# Altium PCB SD10-99-1402.PcbDoc
Units mm, origin at the board's own origin, x right, y up, seen from the top; angles counter-clockwise.
Board outline 95.68 x 44.09 mm, 2 copper layers (TopLayer, BottomLayer); 48 components, 53 nets, 157 pads, 44 vias.
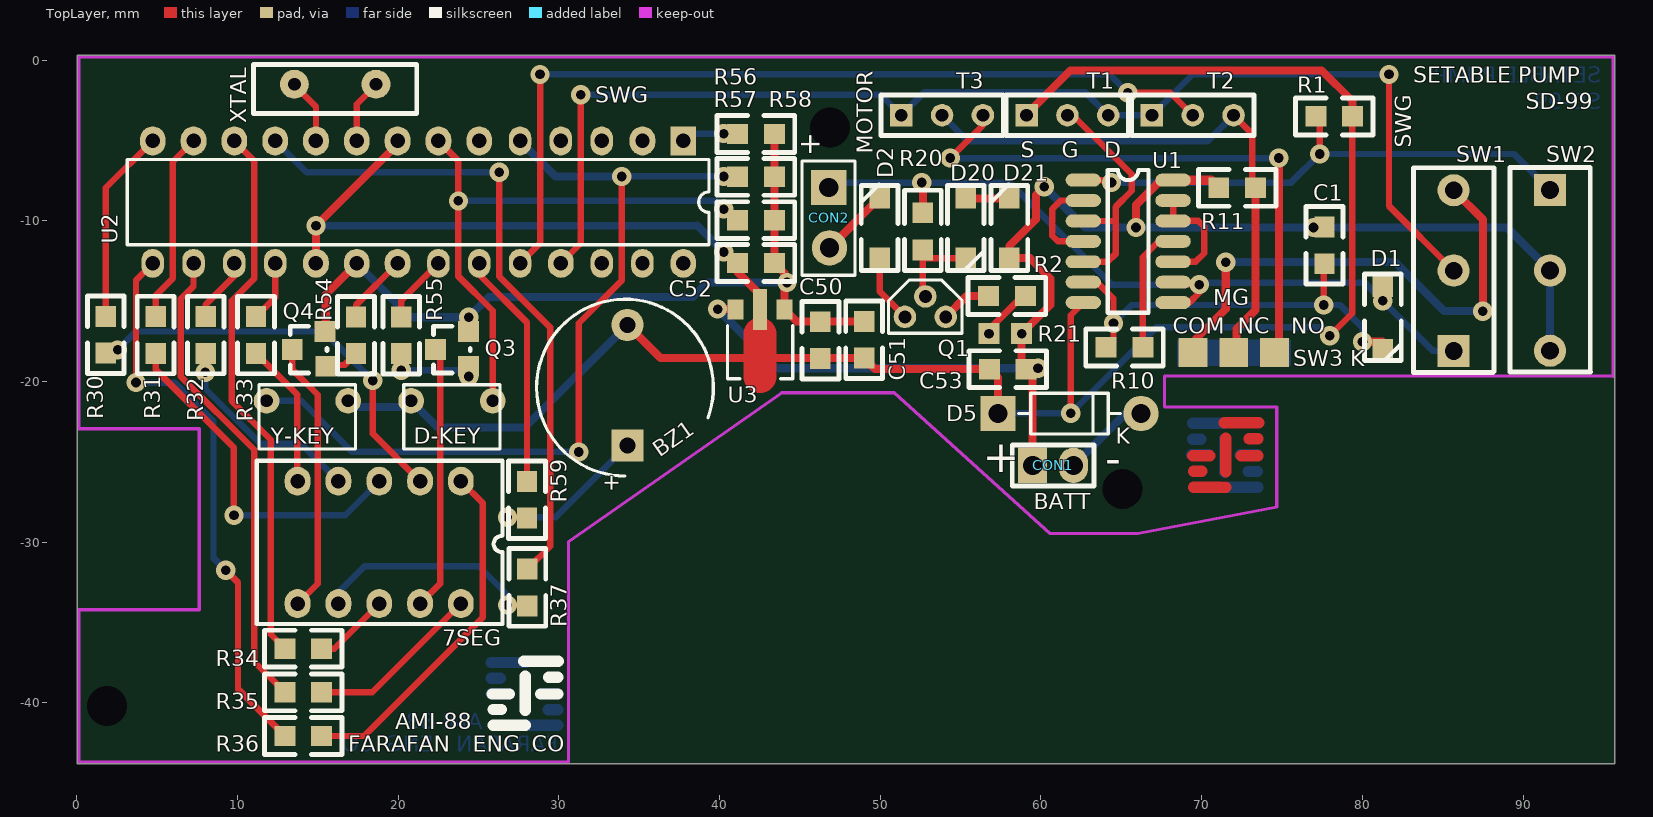
[diagram p0: TopLayer view]
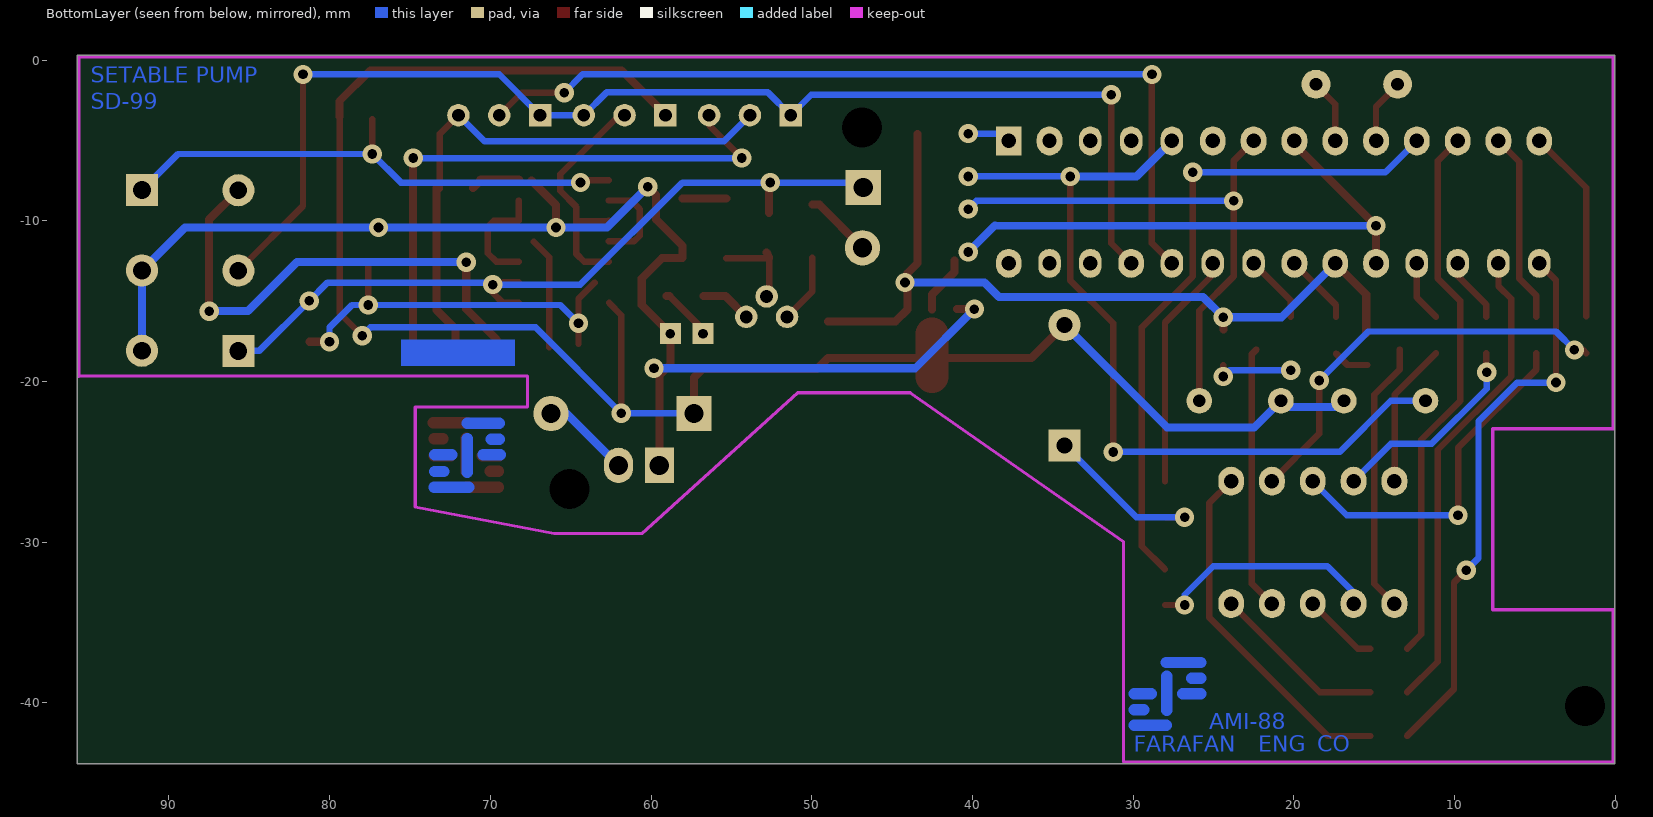
[diagram p1: BottomLayer view, seen from below]

## Layer stack, top to bottom
TopSolder: solder mask 0.0102, Solder Resist, Dk 3.5
TopLayer: signal copper 0.0356
Dielectric1: dielectric 0.32, FR-4, Dk 4.8
BottomLayer: signal copper 0.0356
BottomSolder: solder mask 0.0102, Solder Resist, Dk 3.5

## Board outline
0.027,-43.788 95.711,-43.788 95.711,0.304 0.027,0.304

## Design rules (kind name [scope] priority, off if disabled: settings)
AcuteAngle [All] p1 off: minimum=4.50000000000000E+0001 checktracksonly=FALSE
Clearance [All] p1: gap=0.254
ComponentClearance [All] p1 off: gap=0 collisioncheckmode=3 verticalgap=0.254 showdistances=FALSE
FabricationTestPointUsage TestPointUsage [All] p1: valid=0 allowmultiple=FALSE
FabricationTestpoint Testpoint [All] p1: side=3 testpointundercomponent=TRUE minsize=1.016 maxsize=2.54 preferedsize=1.524 minholesize=0.508 maxholesize=1.016 preferedholesize=0.813 testpointgrid=0.025 allowsidetop=TRUE allowsidebottom=TRUE usegrid=TRUE gridtolerance=0
FanoutControl Fanout_Small [All] p1 off: bgadir=Out bgaviamode=Centered fanoutstyle=Auto fanoutdirection=Alternating viagrid=0.025 // Protel DXP Scope 1 Expression Was: (CompPinCount < 5)   Fanout_Small (Default Rule)
FanoutControl Fanout_Default [All] p2: bgadir=Out bgaviamode=Centered fanoutstyle=Auto fanoutdirection=Alternating viagrid=0.025 // Fanout_Default (Default Rule)
FanoutControl Fanout_SOIC [All] p3 off: bgadir=Out bgaviamode=Centered fanoutstyle=Auto fanoutdirection=Alternating viagrid=0.025 // Protel DXP Scope 1 Expression Was: IsSOIC   Fanout_SOIC (Default Rule)
FanoutControl Fanout_BGA [All] p4 off: bgadir=Out bgaviamode=Centered fanoutstyle=Auto fanoutdirection=Alternating viagrid=0.025 // Protel DXP Scope 1 Expression Was: IsBGA   Fanout_BGA (Default Rule)
FanoutControl Fanout_LCC [All] p5 off: bgadir=Out bgaviamode=Centered fanoutstyle=Auto fanoutdirection=Alternating viagrid=0.025 // Protel DXP Scope 1 Expression Was: IsLCC   Fanout_LCC (Default Rule)
Length [All] p1: maxlimit=2540 minlimit=0
ParallelSegment [All] p1: limit=254 gap=0.254
PolygonConnect [All] p1: connectstyle=Relief reliefconductorwidth=0.254 reliefentries=4 polygonreliefangle="90 Angle" airgapwidth=0.254
RoutingCorners [All] p1: cornerstyle=45-Degree minsetback=0.127 maxsetback=2.54
RoutingLayers [All] p1: top layer_v5=FALSE bottom layer_v5=FALSE
RoutingVias [All] p1: holewidth=0.711 width=1.27 viastyle="Through Hole" minholewidth=0.711 minwidth=1.27 maxholewidth=0.711 maxwidth=1.27
SMDNeckDown [All] p1 off: percent=50.000
SMDToCorner [All] p1 off: distance=0
SMDToPlane [All] p1 off: distance=0
SilkToSolderMaskClearance SilkscreenOverComponentPads [All] p1 off: minsilkscreentomaskgap=0.254 clearancetoexposedcopper=TRUE // Protel DXP Scope 1 Expression Was: IsPad
SolderMaskExpansion [All] p1: expansion=0.102
UnpouredPolygon [All] p1: allowunpoured=FALSE
ViasUnderSMD [All] p1: allowed=TRUE
Width [All] p1: maxlimit=0.254 minlimit=0.254 preferedwidth=0.254
Width Width_1 [All] p2: maxlimit=0.5 minlimit=0.5 preferedwidth=0.5
18 further rules are at their usual default settings.

## Components (designator, comment, footprint, x,y, rotation, side; value= is the part's Value field where it differs from the comment)
7SEG "CA" 7SEG2_CA 18.821,-30.012 r180 top locked
BZ1 "12MM-ARISON" BUZZER 33.884,-20.549 r270 top
C1 "1uF" 0805#1 77.648,-10.389 r270 top
C50 "100nF" 0805#1 46.279,-18.567 r90 top
C51 "10uF" 0805#1 48.997,-16.256 r270 top
C52 "100nF" 0805#1 41.123,-12.624 r0 top
C53 "1uF" 0805#1 59.08,-19.228 r180 top
CON1 "BATT" RAD0.1 59.487,-25.222 r0 top
CON2 "MOTOR" "MOTOR PLUG" 46.787,-7.925 r270 top
D1 "1N4148" 0805#2 81.28,-14.58 r270 top
D2 "1N4148" 0805#3 49.962,-11.811 r90 top
D5 "1N5819" Diode0.4 57.328,-21.996 r0 top
D20 "Z4.7" 0805#4 55.321,-9.525 r270 top
D21 "Z4.7" 0805#3 58.039,-11.811 r90 top
Q1 "BC214B" TO-92A 54.077,-15.977 r180 top
Q3 "2N3906" SOT-23#1 24.359,-18.974 r90 top
Q4 "2N3906" SOT-23#2 15.443,-18.974 r90 top
R1 "4.7M" 0805#1 77.114,-3.505 r0 top
R2 "4.7" 0805#1 56.744,-14.681 r0 top
R10 "3.9M" 0805#1 66.345,-17.882 r180 top
R11 "2M" 0805#1 73.355,-7.95 r180 top
R20 "4.7K" 0805#5 52.654,-11.811 r90 top
R30 "560" 0805#1 1.803,-18.237 r90 top
R31 "560" 0805#1 4.902,-18.25 r90 top
R32 "560" 0805#1 8.026,-18.25 r90 top
R33 "560" 0805#1 11.151,-18.25 r90 top
R34 "560" 0805#1 15.24,-36.627 r180 top
R35 "560" 0805#1 15.24,-39.345 r180 top
R36 "560" 0805#1 15.24,-42.062 r180 top
R37 "560" 0805#1 28.042,-33.96 r90 top
R54 "1.2K" 0805#1 17.374,-18.263 r90 top
R55 "1.2K" 0805#1 20.193,-18.263 r90 top
R56 "1K" 0805#1 41.123,-4.597 r0 top
R57 "10K" 0805#1 41.123,-7.264 r0 top
R58 "10K" 0805#1 41.123,-9.957 r0 top
R59 "33" 0805#1 28.016,-28.499 r90 top
SW1 "MICRO SW" MICSW 85.598,-12.852 r0 top
SW2 "MICRO SW" MICSW 91.77,-13.335 r180 top
SW3 "MICRO SW" MICSW_STND 72,-18.364 r0 top
T1 "VN10" TO-126 64.188,-3.429 r0 top
T2 "VN10" TO-126 71.988,-3.429 r0 top
T3 "VN10" TO-126 56.388,-3.429 r0 top
U1 "4093" SO-14 62.636,-7.468 r0 top
U2 "PIC16F876A" DIP-28 37.744,-5.029 r180 top
U3 "78L05" SOT-89 44.044,-15.519 r180 top
XTAL "11.0592MHz" XTAL1 18.618,-1.803 r180 top
? "Y-KEY" "Reset Key" 11.807,-21.202 r0 top
? "D-KEY" "Reset Key" 20.805,-21.202 r0 top

## Footprints (in the part's own frame and the unit in brackets; to place one, negate y for a bottom-side part, rotate by r counter-clockwise, add the part's x,y. Pads: shape width x height; smd on the part's side, far side on the other; paste and mask are expansions set on the pad)
7SEG2_CA [mm]
  oval 1.6x1.8 hole 0.9: 1(-5.08,-3.81) 2(-2.54,-3.81) 3(0,-3.81) 4(2.54,-3.81) 5(5.08,-3.81) 6(5.08,3.81) 7(2.54,3.81) 8(0,3.81) 9(-2.54,3.81) 10(-5.08,3.81)
  silkscreen extent -7.62,-5.08 7.62,5.08
0805#1 [mm]
  rect 1.3x1.27 smd: 1(0,0) 2(2.286,0)
  silkscreen extent -1.27,-1.14 3.56,1.14
0805#2 [mm]
  rect 1.3x1.27 smd: 1(-0.48,0) 2(3.42,0)
  silkscreen extent -1.27,-1.14 4.12,1.14
0805#3 [mm]
  rect 1.3x1.27 smd: 1(-0.489,0) 2(3.211,0)
  silkscreen extent -1.27,-1.14 4.01,1.14
0805#4 [mm]
  rect 1.3x1.27 smd: 1(-0.925,0) 2(2.775,0)
  silkscreen extent -1.73,-1.14 3.56,1.14
0805#5 [mm]
  rect 1.3x1.27 smd: 1(0,0) 2(2.311,0)
  silkscreen extent -1.27,-1.14 3.71,1.14
BUZZER [mm]
  round 2 hole 1: 1(-4.071,0.381)
  rect 2x2 hole 1: 2(3.429,0.381)
  silkscreen extent -5.67,-5.27 5.33,5.73
Diode0.4 [mm]
  rect 2.2x2.2 hole 1.2: A(0,0)
  round 2.2 hole 1.2: K(8.9,0)
  silkscreen extent 1.27,-1.27 7.62,1.27
DIP-28 [mm]
  rect 1.6x1.8 hole 0.9: 1(0,0)
  oval 1.6x1.8 hole 0.9: 2(2.54,0) 6(12.7,0) 7(15.24,0) 8(17.78,0) 9(20.32,0) 10(22.86,0) 11(25.4,0) 12(27.94,0) 13(30.48,0) 14(33.02,0) 19(22.86,7.62) 20(20.32,7.62) 21(17.78,7.62) 25(7.62,7.62) 28(0,7.62)
  oval 1.4x1.8 hole 0.9: 3(5.08,0) 4(7.62,0) 5(10.16,0) 15(33.02,7.62) 16(30.48,7.62) 17(27.94,7.62) 18(25.4,7.62) 22(15.24,7.62) 23(12.7,7.62) 24(10.16,7.62) 26(5.08,7.62) 27(2.54,7.62)
  silkscreen extent -1.59,1.16 34.61,6.46
MICSW [mm]
  round 2 hole 1.1: 1(0.086,4.753) 2(0.086,-0.247)
  rect 2x2 hole 1.1: 3(0.086,-5.247)
  silkscreen extent -2.41,-5.55 2.59,6.15
MICSW_STND [mm]
  rect 1.8x1.8 smd: 1(2.54,0.164) 2(0,0.164) 3(-2.54,0.164)
  BottomLayer region: -3.547,-0.686 3.565,-0.686 3.565,0.965 -3.547,0.965
"MOTOR PLUG" [mm]
  rect 2.2x2.2 hole 1.2: 1(0,0)
  round 2.2 hole 1.2: 2(3.759,0.056)
  silkscreen extent -1.65,-1.65 5.46,1.65
RAD0.1 [mm]
  rect 1.8x2.2 hole 1.2: 1(0,0)
  oval 1.8x2.2 hole 1.2: 2(2.54,0)
  silkscreen extent -1.27,-1.27 3.81,1.27
"Reset Key" [mm]
  round 1.6 hole 0.8: 0(0,0) 1(5.08,0)
  silkscreen extent -0.46,-3 5.54,1
SO-14 [mm]
  oval 2.2x0.8 smd: 1(0,0) 2(0,-1.27) 3(0,-2.54) 4(0,-3.81) 5(0,-5.08) 6(0,-6.35) 7(0,-7.62) 8(5.588,-7.62) 9(5.588,-6.35) 10(5.588,-5.08) 11(5.588,-3.81) 12(5.588,-2.54) 13(5.588,-1.27) 14(5.588,0)
  silkscreen extent 1.52,-8.25 4.06,0.64
SOT-23#1 [mm]
  rect 1.3x1.3 smd: +5(2.083,-0.025) A3(0.965,2.032) B3(-0.076,-0.025)
  silkscreen extent -0.51,-0.13 2.41,2.16
SOT-23#2 [mm]
  rect 1.3x1.3 smd: +5(2.083,0) A4(0.965,2.032) B4(-0.076,-0.051)
  silkscreen extent -0.51,-0.13 2.41,2.16
SOT-89 [mil]
  rect 39.37x50 smd: 1(0,0) 3(120,0)
  rect 34x100 smd: 2(60,0)
  TopLayer lines w80: 60,164.59 60,60
  silkscreen extent -20,40 140,170
TO-92A [mm]
  round 1.4 hole 0.8: 1(2.54,0) 2(1.27,-1.27) 3(0,0)
  silkscreen extent -1.02,-2.29 3.56,1.02
TO-126 [mm]
  rect 1.4x1.4 hole 0.8: 1(-5.08,0)
  round 1.4 hole 0.8: 2(-2.54,0) 3(0,0)
  silkscreen extent -6.35,-1.27 1.27,1.27
XTAL1 [mm]
  round 1.8 hole 0.8: 1(0,-0.303) 2(5.08,-0.303)
  silkscreen extent -2.54,-1.52 7.62,1.52

## Free pads (board coordinates)
  rect 1.3x1.3 hole 0.6: 0(56.769,-17.018) 1(58.801,-17.018)
  round 0 hole 2.5: 4(1.873,-40.196) 6(65.073,-26.696) 7(46.873,-4.196)

## Via types
v1: diameter 1.2, hole 0.6, TopLayer to BottomLayer, 44 vias

## Nets (pads, with @x,y where several pads share a name; then routed paths per layer and width w, separated by ;. In a path a pad name is that pad's centre, name@x,y a point inside that pad or via, vN(x,y) a via of type N, cw(c..) or ccw(c..) an arc to the next point about the centre after c; other vN are vias at no path point)
+5V: 
+9V: 
A: 
A1: 
A2: 
B: 
C: 
D: 
D.P: 
DISGND: 
E: 
F: 
G: 
GND: 
HIGHLED: 
LOWLED: 
MCLR: 
MCRL: 
MGND: 
NetD2_2: 
NetD20_1: 
NetJ5_2: 
NetQ1_1: 
NetQ1_3: 
NetR2_1: 
NetR10_1: 
NetR20_1: 
NetR46_2: 
NetR47_2: 
NetR48_2: 
NetR49_2: 
NetR54_2: 
NetR55_2: 
NetR59_2: 
NetSW1_1: 
NetSW3_1: 
NetSW3_2: 
NetU1_1: 
NetU1_3: 
NetU1_4: 
NetU1_6: 
NetU1_12: 
NetU4_15: 
NetU4_16: 
NetU4_17: 
NetU4_18: 
NetU4_24: 
NetXTAL_1: 
NetXTAL_2: 
SW1: 
SW2: 
SWGND: 
VDD: 
pads on no net: 7SEG.1 7SEG.2 7SEG.3 7SEG.4 7SEG.5 7SEG.6 7SEG.7 7SEG.8 7SEG.9 7SEG.10 ?.0 ?.1 BZ1.1 BZ1.2 C1.1 C1.2 C50.1 C50.2 C51.1 C51.2 C52.1 C52.2 C53.1 C53.2 CON1.1 CON1.2 CON2.1 CON2.2 D1.1 D1.2 D2.1 D2.2 D5.A D5.K D20.1 D20.2 D21.1 D21.2 Q1.1 Q1.2 Q1.3 Q3.+5 Q3.A3 Q3.B3 Q4.+5 Q4.A4 Q4.B4 R1.1 R1.2 R2.1 R2.2 R10.1 R10.2 R11.1 R11.2 R20.1 R20.2 R30.1 R30.2 R31.1 R31.2 R32.1 R32.2 R33.1 R33.2 R34.1 R34.2 R35.1 R35.2 R36.1 R36.2 R37.1 R37.2 R54.1 R54.2 R55.1 R55.2 R56.1 R56.2 R57.1 R57.2 R58.1 R58.2 R59.1 R59.2 SW1.1 SW1.2 SW1.3 SW2.1 SW2.2 SW2.3 SW3.1 SW3.2 SW3.3 T1.1 T1.2 T1.3 T2.1 T2.2 T2.3 T3.1 T3.2 T3.3 U1.1 U1.2 U1.3 U1.4 U1.5 U1.6 U1.7 U1.8 U1.9 U1.10 U1.11 U1.12 U1.13 U1.14 U2.1 U2.2 U2.3 U2.4 U2.5 U2.6 U2.7 U2.8 U2.9 U2.10 U2.11 U2.12 U2.13 U2.14 U2.15 U2.16 U2.17 U2.18 U2.19 U2.20 U2.21 U2.22 U2.23 U2.24 U2.25 U2.26 U2.27 U2.28 U3.1 U3.2 U3.3 XTAL.1 XTAL.2
copper on no net: | length 1199.2
  TopLayer w0.4: 1.803,-18.237 2.007,-18.034 v1(2.54,-18.034) ; 1.803,-15.951 1.803,-7.95 4.724,-5.029 ; v1(3.683,-20.066) 3.683,-13.691 4.724,-12.649 4.724,-13.03 ; 4.902,-18.25 4.902,-19.253 9.779,-24.13 v1(9.779,-28.321) ; 4.902,-15.964 4.902,-14.656 5.969,-13.589 5.969,-6.325 7.264,-5.029 ; 7.264,-12.649 7.264,-14.072 6.477,-14.859 6.477,-19.685 11.049,-24.257 11.049,-37.44 12.954,-39.345 ; v1@8.026,-19.406 8.026,-18.25 ; 8.026,-15.964 8.026,-15.215 9.804,-13.437 9.804,-12.649 ; v1(9.271,-31.75) 10.033,-32.512 10.033,-39.141 12.954,-42.062 ; 9.804,-5.029 11.049,-6.274 11.049,-13.589 9.652,-14.986 9.652,-21.209 12.065,-23.622 12.065,-35.738 12.954,-36.627 ; 11.151,-18.25 13.716,-20.815 13.716,-26.177 ; 11.151,-15.964 12.344,-14.77 12.344,-12.649 ; 13.411,-18.009 13.411,-19.253 14.986,-20.828 14.986,-32.577 13.741,-33.822 ; 13.538,-1.549 14.884,-2.896 14.884,-5.029 ; 15.24,-42.062 17.882,-42.062 25.273,-34.671 25.273,-27.574 23.901,-26.202 ; 15.24,-39.345 18.379,-39.345 23.901,-33.822 ; 15.24,-36.627 16.017,-36.627 18.821,-33.822 ; 15.443,-18.974 16.662,-18.974 17.374,-18.263 ; 17.374,-15.977 17.374,-15.24 19.964,-12.649 ; 17.424,-5.029 17.424,-2.743 18.618,-1.549 ; v1(18.415,-19.939) 18.415,-23.241 21.361,-26.202 ; 20.193,-15.977 20.193,-14.961 22.504,-12.649 ; 21.361,-33.822 22.606,-32.577 22.606,-18.288 22.327,-18.009 ; 22.504,-5.029 23.749,-6.274 v1(23.749,-8.763) 23.749,-13.462 25.885,-15.598 25.885,-21.202 ; v1(24.384,-19.685) 24.384,-18.999 ; 25.044,-12.649 25.044,-13.36 28.016,-16.332 28.016,-26.213 ; v1(26.289,-6.985) 26.289,-13.462 29.464,-16.637 29.464,-30.251 28.042,-31.674 ; v1(26.797,-33.909) 27.991,-33.909 ; v1(26.797,-28.448) 27.965,-28.448 ; 27.584,-12.649 28.829,-11.405 v1(28.829,-0.889) ; 30.124,-12.649 31.369,-11.405 v1(31.369,-2.159) ; v1(31.242,-24.384) 31.242,-16.383 33.909,-13.716 v1(33.909,-7.239) ; 49.962,-12.3 49.962,-14.402 51.537,-15.977 ; 52.807,-14.707 52.654,-14.554 52.654,-12.319 55.321,-12.319 ; v1(54.356,-6.096) 56.388,-4.064 56.388,-3.429 ; 56.769,-17.018 56.769,-16.764 58.852,-14.681 ; v1(61.849,-21.971) 61.849,-15.875 62.611,-15.113 ; 61.976,-3.429 65.659,-7.112 65.659,-8.128 64.643,-9.144 64.643,-12.065 64.16,-12.548 62.636,-12.548 ; 62.636,-11.278 61.062,-11.278 60.706,-10.922 60.706,-9.271 61.239,-8.738 62.636,-8.738 ; 62.636,-10.008 64.643,-10.033 ; 62.636,-7.468 64.237,-7.468 v1(64.389,-7.62) ; 63.5,-13.843 64.516,-14.859 64.516,-17.653 ; v1(65.405,-2.032) 68.051,-2.032 69.448,-3.429 ; 66.345,-17.882 66.345,-12.268 67.31,-11.303 ; 68.224,-15.088 69.24,-15.088 69.85,-14.478 69.19,-13.818 68.224,-13.818 ; 68.224,-12.548 69.621,-12.548 70.155,-12.014 70.155,-10.363 69.799,-10.008 68.224,-10.008 68.224,-8.738 ; 71.988,-3.429 73.152,-4.593 73.152,-8.001 ; v1(77.343,-5.842) 77.343,-3.683 ; v1@77.597,-15.621 77.597,-12.725 ; v1(77.978,-17.145) 79.375,-15.748 79.375,-3.505 ; v1(81.661,-0.889) 81.661,-9.076 85.684,-13.099
  TopLayer w0.5: 14.884,-12.649 v1(14.884,-10.312) 19.964,-5.232 19.964,-5.029 ; 15.494,-17.018 15.494,-16.002 15.494,-14.58 17.424,-12.649 ; 24.384,-16.764 v1(24.384,-16.002) ; 34.265,-16.478 36.329,-18.542 42.52,-18.542 ; v1(39.878,-15.494) 40.97,-15.494 ; 41.123,-12.471 41.123,-12.624 41.123,-13.183 42.52,-14.58 42.52,-15.519 ; 42.52,-18.161 42.901,-18.542 46.304,-18.542 48.997,-18.542 49.682,-19.228 56.794,-19.228 57.328,-19.761 57.328,-21.996 ; 43.409,-7.01 43.409,-6.883 ; 43.409,-4.597 43.409,-9.957 43.409,-12.624 44.044,-13.259 44.044,-15.519 44.78,-16.256 48.997,-16.256 ; 46.842,-11.684 49.526,-9 49.962,-9 ; 52.654,-12.319 52.807,-11.963 ; 52.654,-9.5 v1@52.654,-7.696 ; 54.077,-15.977 55.372,-14.681 56.744,-14.681 ; 55.321,-8.619 58.039,-8.619 ; 58.852,-14.681 59.03,-14.681 ; 59.108,-3.376 61.849,-0.635 77.47,-0.635 79.4,-2.565 79.4,-3.505 ; 59.487,-25.222 59.487,-19.634 58.801,-18.948 58.801,-17.018 60.579,-15.24 60.579,-13.589 59.309,-12.319 58.039,-12.3 58.039,-11.557 59.69,-9.906 59.69,-8.382 v1(60.198,-7.874) ; v1(65.913,-10.414) 65.913,-9.017 67.437,-7.493 ; 69.621,-18.618 69.621,-17.374 71.501,-15.494 v1(71.501,-12.573) ; 70.587,-7.468 71.069,-7.95 ; 72.161,-18.618 72.161,-16.739 73.355,-15.545 73.355,-7.95 ; 74.701,-18.618 74.803,-18.517 v1(74.803,-6.096) ; v1(80.01,-17.526) 81.254,-17.526 ; 85.684,-8.099 87.503,-9.918 v1(87.503,-15.621)
  TopLayer w0.6: 68.224,-7.468 70.587,-7.468
  TopLayer w0.711: 69.444,-24.613 70.51,-24.613 ; 69.494,-26.568 71.501,-26.568 ; 69.494,-25.578 70.002,-25.578 ; 71.399,-22.581 73.558,-22.581 ; 71.501,-25.629 71.501,-23.52 ; 72.466,-24.613 73.508,-24.613 ; 72.949,-23.571 73.508,-23.571
  BottomLayer w0.4: v1(2.54,-18.034) 3.683,-16.891 15.367,-16.891 v1(18.415,-19.939) ; v1(3.683,-20.066) 6.096,-20.066 8.509,-22.479 8.509,-30.988 v1(9.271,-31.75) ; v1(8.001,-19.431) 8.001,-20.447 11.43,-23.876 13.955,-23.876 16.281,-26.202 ; v1(9.779,-28.321) 16.702,-28.321 18.821,-26.202 ; 11.807,-21.202 13.963,-21.202 17.145,-24.384 v1(31.242,-24.384) ; 12.344,-5.029 14.3,-6.985 v1(26.289,-6.985) ; 16.281,-33.822 16.281,-33.122 17.907,-31.496 25.019,-31.496 26.797,-33.274 v1(26.797,-33.909) ; v1(20.193,-19.304) 24.003,-19.304 v1(24.384,-19.685) ; v1(23.749,-8.763) 39.751,-8.763 v1(40.259,-9.271) ; v1(26.797,-28.448) 29.794,-28.448 34.265,-23.978 ; v1(28.829,-0.889) 64.262,-0.889 v1(65.405,-2.032) ; v1(31.369,-2.159) 50.038,-2.159 51.308,-3.429 52.726,-2.011 62.77,-2.011 64.188,-3.429 66.908,-3.429 69.448,-0.889 v1(81.661,-0.889) ; v1(33.909,-7.239) v1(40.259,-7.239) ; 37.744,-5.029 38.202,-4.572 v1(40.259,-4.572) ; 46.787,-7.925 47.092,-7.62 v1(52.578,-7.62) 58.039,-7.62 64.409,-13.97 v1(69.85,-13.97) ; 53.848,-3.429 55.478,-5.059 70.358,-5.059 71.988,-3.429 ; v1(54.356,-6.096) v1(74.803,-6.096) ; 57.353,-21.971 v1(61.849,-21.971) 67.183,-16.637 77.47,-16.637 v1(77.978,-17.145) ; v1(64.389,-7.62) 75.565,-7.62 v1(77.343,-5.842) 89.438,-5.842 91.684,-8.088 ; v1(64.516,-16.383) 65.659,-15.24 78.613,-15.24 80.01,-16.637 v1(80.01,-17.526) ; v1@69.977,-14.224 70.358,-13.843 80.137,-13.843 v1(81.28,-14.986) 84.393,-18.099 85.684,-18.099 ; 85.684,-18.099 85.684,-17.485 85.684,-18.099
  BottomLayer w0.5: v1(14.884,-10.312) 38.608,-10.287 v1(40.259,-11.938) ; 16.891,-21.59 21.186,-21.583 22.463,-22.86 27.882,-22.86 34.265,-16.478 ; 17.424,-12.649 20.777,-16.002 v1(24.384,-16.002) 25.654,-14.732 38.354,-14.732 39.243,-13.843 v1(44.196,-13.843) ; 27.584,-5.029 29.794,-7.239 v1(33.909,-7.239) ; v1(39.878,-15.494) 43.561,-19.177 v1(59.817,-19.177) ; v1(60.198,-7.874) 62.738,-10.414 v1(65.913,-10.414) v1(76.962,-10.414) 89.01,-10.414 91.684,-13.088 91.684,-18.088 ; 62.027,-25.222 65.253,-21.996 ; 65.278,-21.971 66.228,-21.996 ; v1(71.501,-12.573) 82.042,-12.573 85.09,-15.621 v1(87.503,-15.621)
  BottomLayer w0.711: 25.781,-39.444 26.924,-39.444 ; 25.781,-38.466 26.34,-38.466 ; 25.781,-37.486 27.94,-37.486 ; 27.915,-40.462 27.915,-38.354 ; 27.94,-41.402 29.921,-41.402 ; 28.88,-39.444 29.921,-39.444 ; 29.337,-40.424 29.921,-40.424 ; 69.393,-24.562 70.46,-24.562 ; 69.444,-23.597 69.952,-23.597 ; 69.444,-22.606 71.45,-22.606 ; 71.349,-26.594 73.508,-26.594 ; 71.45,-25.654 71.45,-23.546 ; 72.415,-24.562 73.457,-24.562 ; 72.898,-25.603 73.457,-25.603
  other v1: 77.597,-15.24

## Keep-outs
KeepOutLayer:
  lines w0.2: 95.611,-19.669 95.611,0.204 0.127,0.204 0.127,-22.942 7.627,-22.942 7.627,-34.204 0.127,-34.204 0.127,-43.688 30.607,-43.688 30.607,-29.972 43.873,-20.696 50.873,-20.696 60.579,-29.464 66.04,-29.464 74.676,-27.813 74.676,-21.59 67.691,-21.59 67.691,-19.663 95.611,-19.663

## Other copper
TopLayer:
BottomLayer:
  text "SETABLE PUMP" at 94.869,-1.397 h1
  text "SD-99" at 94.869,-3.048 h1
  text "AMI-88" at 25.273,-41.656 h1
  text "CO" at 18.542,-43.053 h1
  text "ENG" at 22.225,-43.053 h1
  text "FARAFAN" at 29.972,-43.053 h1

## Silkscreen, mask and mechanical layers (free items; w line width, h text height)
TopOverlay:
  lines w0.254: 26.441,-30.607 cw(c26.441,-30.107) 26.441,-29.607 ; 26.503,-35.092 26.503,-30.607 ; 26.503,-29.591 26.503,-24.932 ; 48.895,-8.763 49.911,-7.747 ; 55.372,-12.954 56.388,-11.938 ; 56.972,-8.763 57.988,-7.747 ; 81.432,-18.644 82.423,-17.653
  lines w0.305: 83.184,-18.399 83.184,-19.43 83.185,-19.431 88.138,-19.431 88.184,-19.385 88.184,-18.399 ; 89.184,-18.488 89.184,-19.401 94.204,-19.401 94.184,-19.381 94.184,-18.488
  lines w0.711: 25.857,-39.446 26.924,-39.446 ; 25.908,-41.402 27.915,-41.402 ; 25.908,-40.411 26.416,-40.411 ; 27.813,-37.414 29.972,-37.414 ; 27.915,-40.462 27.915,-38.354 ; 28.88,-39.446 29.921,-39.446 ; 29.362,-38.405 29.921,-38.405
  text "SETABLE PUMP" at 83.185,-1.397 h1
  text "SWG" at 32.258,-2.667 h1
  text "SD-99" at 90.17,-3.048 h1
  text "SWG" at 83.058,-5.461 h1 r90
  text "S" at 58.744,-6.075 h1
  text "G" at 61.284,-6.075 h1
  text "D" at 63.951,-6.075 h1
  text "MG" at 70.739,-15.24 h1
  text "COM" at 68.199,-17.018 h1
  text "NC" at 72.263,-17.018 h1
  text "NO" at 75.565,-17.018 h1
  text "R21" at 59.817,-17.526 h1
  text "K" at 79.248,-19.05 h1
  text "K" at 64.643,-23.876 h1
  text "+" at 56.388,-25.654 h2
  text "-" at 64.008,-25.781 h2
  text "AMI-88" at 19.812,-41.656 h1
  text "FARAFAN" at 16.891,-43.053 h1
  text "ENG" at 24.638,-43.053 h1
  text "CO" at 28.321,-43.053 h1
BottomSolder:
  lines w0.254: 86.233,-19.663 86.106,-19.79 86.106,-25.908 86.36,-26.162 95.591,-26.162 95.611,-26.142 95.611,-19.669
  text "hall effect near end ensor" at 66.548,-35.941 h1.52

## Text inside footprints (layer, text, board x,y; h text height)
BZ1: TopOverlay "+" at 33.731,-26.899 h1 r90
CON2: TopOverlay "+" at 46.228,-5.969 h1.3 r90